# Altium PCB PC4-SODIMM_V200_RC_A1_20141015.PcbDoc (part 2 of 7)
Units mm, origin at the board's own origin, x right, y up, seen from the top; angles counter-clockwise.
Board outline 69.63 x 30.03 mm, 8 copper layers (TOP, SPLIT2, S3, VDD4, S5, S6, SPLIT7, BOTTOM), stack 1.2 mm thick; 199 components, 229 nets, 1321 pads, 785 vias.
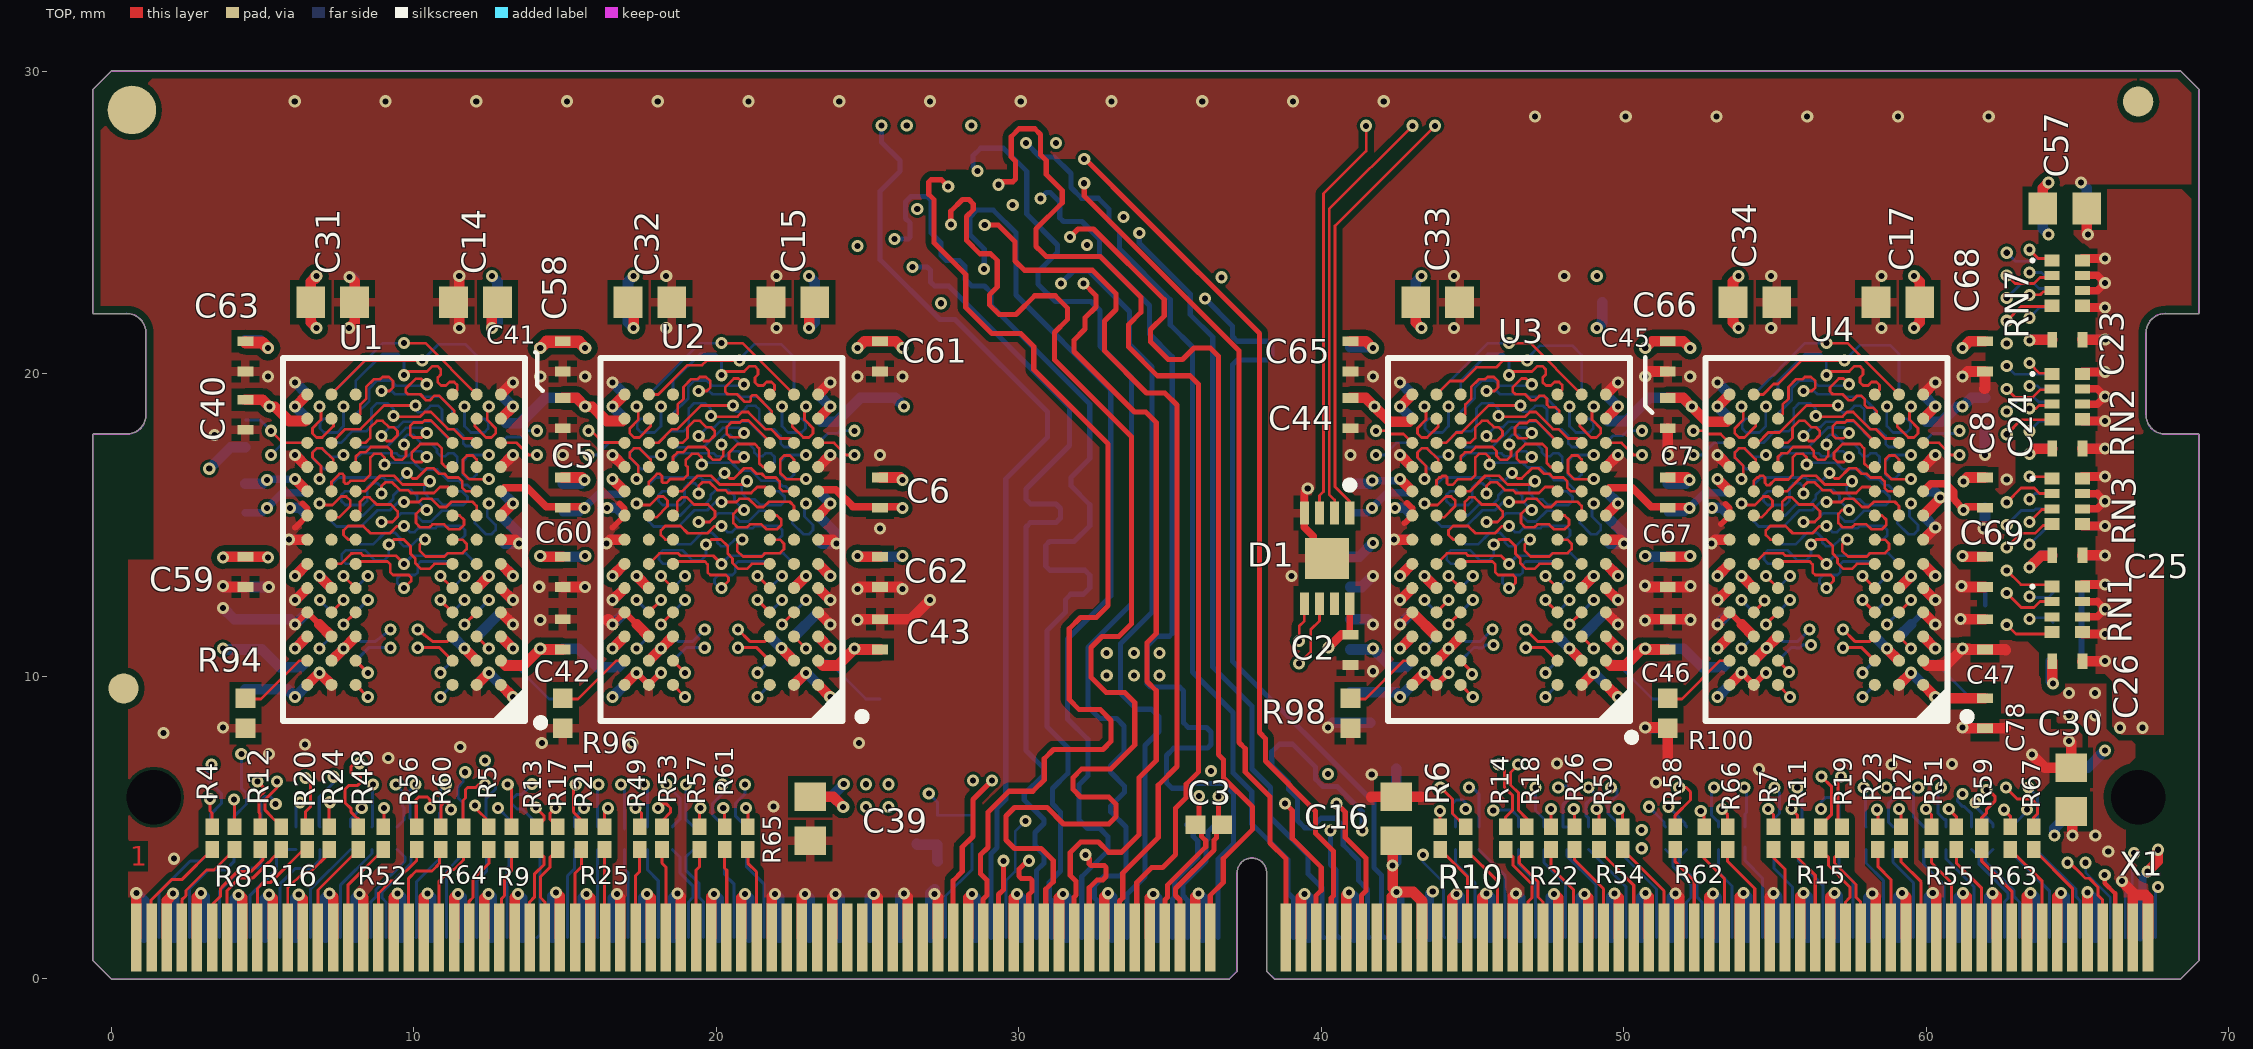
[diagram p0: TOP view]

## Part data (continued)
RN1 RN2 RN3 RN4 RN5 RN6 RN7: library part CMP-1734-00001-1, "Chip Resistor Array, 36 Ohm, +/- 5%, 62.5 mW, -55 to 125 degC, 8-Pin SMD, RoHS, Tape and Reel", Case/Package=0804, Case Code (Metric)=2010, Max Operating Temperature="125 degC", Min Operating Temperature="-55 degC", Package Quantity=10000, Power Rating="120 mW", Resistance="36 Ohm", Tolerance=5%, Type (Resistor)="Thick Film", ComponentLink1Description="Manufacturer URL", ComponentLink1URL=http://www.bourns.com/, ComponentLink2Description=Datasheet, ComponentLink2URL=http://www.bourns.com/docs/Product-Datasheets/CAY10.pdf, DatasheetVersion=01/2015, Height="0.018 inch", Length="0.079 inch", Mount="Surface Mount", Mounting Technology="Surface Mount", PackageDescription="8-Pin Surface Mount Device, Body 2 x 1 mm, Pitch 0.5 mm", Packaging="Tape and Reel", PartNumber=CAY10-360J4LF, Pins=8, RoHSCompliant=true, Width="0.039 inch"
U1 U2 U3 U4 U5 U6 U7 U8: library part CMP-1738-00001-1, "8 Gb DDR4 SDRAM, 1 Gig x 8, 1.2 V, 0 to 95 degC, 78-Ball FBGA (WE), RoHS", ComponentLink1Description="Manufacturer URL", ComponentLink1URL=http://www.micron.com/, ComponentLink2Description=Datasheet, ComponentLink2URL=https://www.micron.com/~/media/documents/products/data-sheet/dram/ddr4/8gb_ddr4_sdram.pdf, DatasheetVersion="Rev. E, 05/2016", Mounting Technology="Surface Mount", PackageDescription="78-Ball Ball Grid Array, Body 8 x 12 mm, Pitch 0.8 mm", PartId=1, PartNumber=MT40A1G8WE-083E:B
X1: library part CMP-0001-00005-1, "Golden finger, SODIMM, Dual, Staggered, Pitch 0.5mm, 260-Position", Package Reference=SODIMM-GF-2D-500-1K-S260, Class Name="Edge Connector", Mating Connector=AS0A823-H4SB-7H, Publisher=Altium, System=Connector

## Free pads (board coordinates)
  round 1 smd: 2(0.4,9.6) 2(67,29)
  round 1 smd far side: 2(0.4,9.6) 2(67,29)
  round 1.6 smd: 2(0.675,28.725)
  round 1.6 smd far side: 2(0.675,28.725)
  round 0 hole 1.8 unplated: ""(1.4,6) ""(67,6)

## Via types
v1: diameter 0.4, hole 0.2, TOP to BOTTOM, tented both sides, 785 vias

## Nets (pads, with @x,y where several pads share a name; then routed paths per layer and width w, separated by ;. In a path a pad name is that pad's centre, name@x,y a point inside that pad or via, vN(x,y) a via of type N, cw(c..) or ccw(c..) an arc to the next point about the centre after c; other vN are vias at no path point)
A00: RN5.3 U1.L3 U2.L3 U3.L3 U4.L3 U5.L3 U6.L3 U7.L3 U8.L3 X1.144 | length 157.2
  TOP w0.09: v1(10.423,18.049) 10.267,17.893 9.967,17.893 9.88,17.98 9.88,18.286 9.986,18.392 10.284,18.392 10.351,18.459 10.566,18.459 11.278,17.746 11.278,17.722 U1.L3@11.273,17.717 ; v1(20.913,18.049) 20.77,17.906 20.446,17.906 20.342,18.01 20.342,18.245 20.489,18.392 20.774,18.392 20.84,18.459 21.056,18.459 21.763,17.751 U2.L3@21.763,17.717 ; v1(46.953,18.049) 46.773,17.869 46.523,17.869 46.396,17.996 46.396,18.226 46.545,18.375 46.797,18.375 46.881,18.459 47.095,18.459 47.803,17.751 U3.L3@47.803,17.717 ; v1(57.443,18.049) 57.263,17.869 57.013,17.869 56.9,17.982 56.9,18.26 57.032,18.392 57.304,18.392 57.37,18.459 57.586,18.459 58.259,17.785 58.259,17.751 U4.L3@58.293,17.717
  S6 w0.075: 5.536,20.346 6.01,20.346 7.277,19.079 7.277,18.747 7.469,18.555 8.863,18.555 9.173,18.244 9.473,18.244 9.598,18.369 10.103,18.369 v1(10.423,18.049) 10.926,18.552 12.703,18.552 12.91,18.76 12.91,19.067 13.123,19.28 13.51,19.28 13.708,19.082 13.708,18.892 13.867,18.733 14.368,18.733 14.523,18.888 14.523,19.061 14.697,19.235 15.077,19.235 15.25,19.062 15.25,18.815 15.511,18.555 16.606,18.555 16.9,18.261 17.364,18.261 17.658,18.555 19.352,18.555 19.663,18.244 19.963,18.244 20.078,18.359 20.603,18.359 v1(20.913,18.049) 21.416,18.552 24.689,18.552 25.014,18.877 25.678,18.877 26.222,18.333 27.494,18.333 27.886,18.725 30.579,18.725 31.06,18.244 33.382,18.244 34.312,19.176 40.641,19.176 41.337,18.48 41.953,18.48 42.09,18.343 42.837,18.343 42.955,18.46 45.487,18.46 45.703,18.244 46.003,18.244 46.1,18.342 46.66,18.342 v1(46.953,18.049) 47.456,18.552 49.233,18.552 49.441,18.76 49.441,19.067 49.653,19.28 50.04,19.28 50.238,19.082 50.238,18.892 50.397,18.733 50.898,18.733 51.053,18.888 51.053,19.061 51.227,19.235 51.607,19.235 51.78,19.062 51.78,18.815 52.041,18.555 53.137,18.555 53.43,18.261 53.894,18.261 54.187,18.555 55.882,18.555 56.192,18.244 56.493,18.244 56.608,18.359 56.992,18.359 57.107,18.244 57.248,18.244 v1(57.443,18.049) 57.873,18.479 60.389,18.479 60.697,18.787 60.697,19.012 61.063,19.378 62.1,19.378 62.362,19.116 62.919,19.116 v1(63.406,19.603)
  S6 w0.15: 5.536,20.346 5.107,20.346 4.771,20.682 4.771,25.135 6.091,26.455 26.838,26.455 27.495,25.798 29.436,25.798 29.596,25.958 29.637,25.958 29.639,25.96 30.042,25.96 30.15,26.068 30.15,26.624 30.258,26.732 31.054,26.732 31.323,26.463 31.323,25.953 31.168,25.798 v1(30.711,25.798)
  BOTTOM w0.09: U8.L3@8.073,17.717 8.21,17.58 9.1,17.58 9.736,18.216 10.266,18.216 10.423,18.059 v1(10.423,18.049) ; U7.L3@18.563,17.717 18.708,17.572 19.576,17.572 20.219,18.215 20.747,18.215 v1(20.913,18.049) ; U6.L3@44.603,17.717 44.74,17.58 45.64,17.58 45.857,17.797 46.095,18.035 46.283,18.223 46.779,18.223 v1(46.953,18.049) ; U5.L3@55.093,17.717 55.23,17.58 56.109,17.58 56.752,18.223 57.269,18.223 v1(57.443,18.049) ; v1(63.406,19.603) 63.666,19.603 63.766,19.503 RN5.3@64.149,19.503
  BOTTOM w0.17: v1(30.711,25.798) 30.907,25.994 31.038,25.994 31.349,25.683 31.349,25.16 31.472,25.037 32.08,25.037 32.664,24.453 32.664,23.915 34.316,22.263 34.316,21.315 35.068,20.563 35.068,11.425 34.967,11.324 34.563,11.324 34.241,11.002 34.241,9.747 34.347,9.641 35.315,9.641 35.445,9.511 35.445,8.462 35.597,8.31 36.196,8.31 36.349,8.157 36.349,7.744 36.23,7.625 35.117,7.625 34.877,7.385 34.877,6.485 35.064,6.298 35.507,6.298 35.664,6.455 36.761,6.455 37.087,6.129 37.087,4.466 36.575,3.954 X1.144@36.575,1.365